# Altium PCB Laird RG191-M2 LoRa Concentrator Daughterboard.PcbDoc
Units mil, origin at the board's own origin, x right, y up, seen from the top; angles counter-clockwise.
Board outline 2120 x 3285 mil, 2 copper layers (Top Layer, Bottom Layer); 24 components, 18 nets, 185 pads, 130 vias.
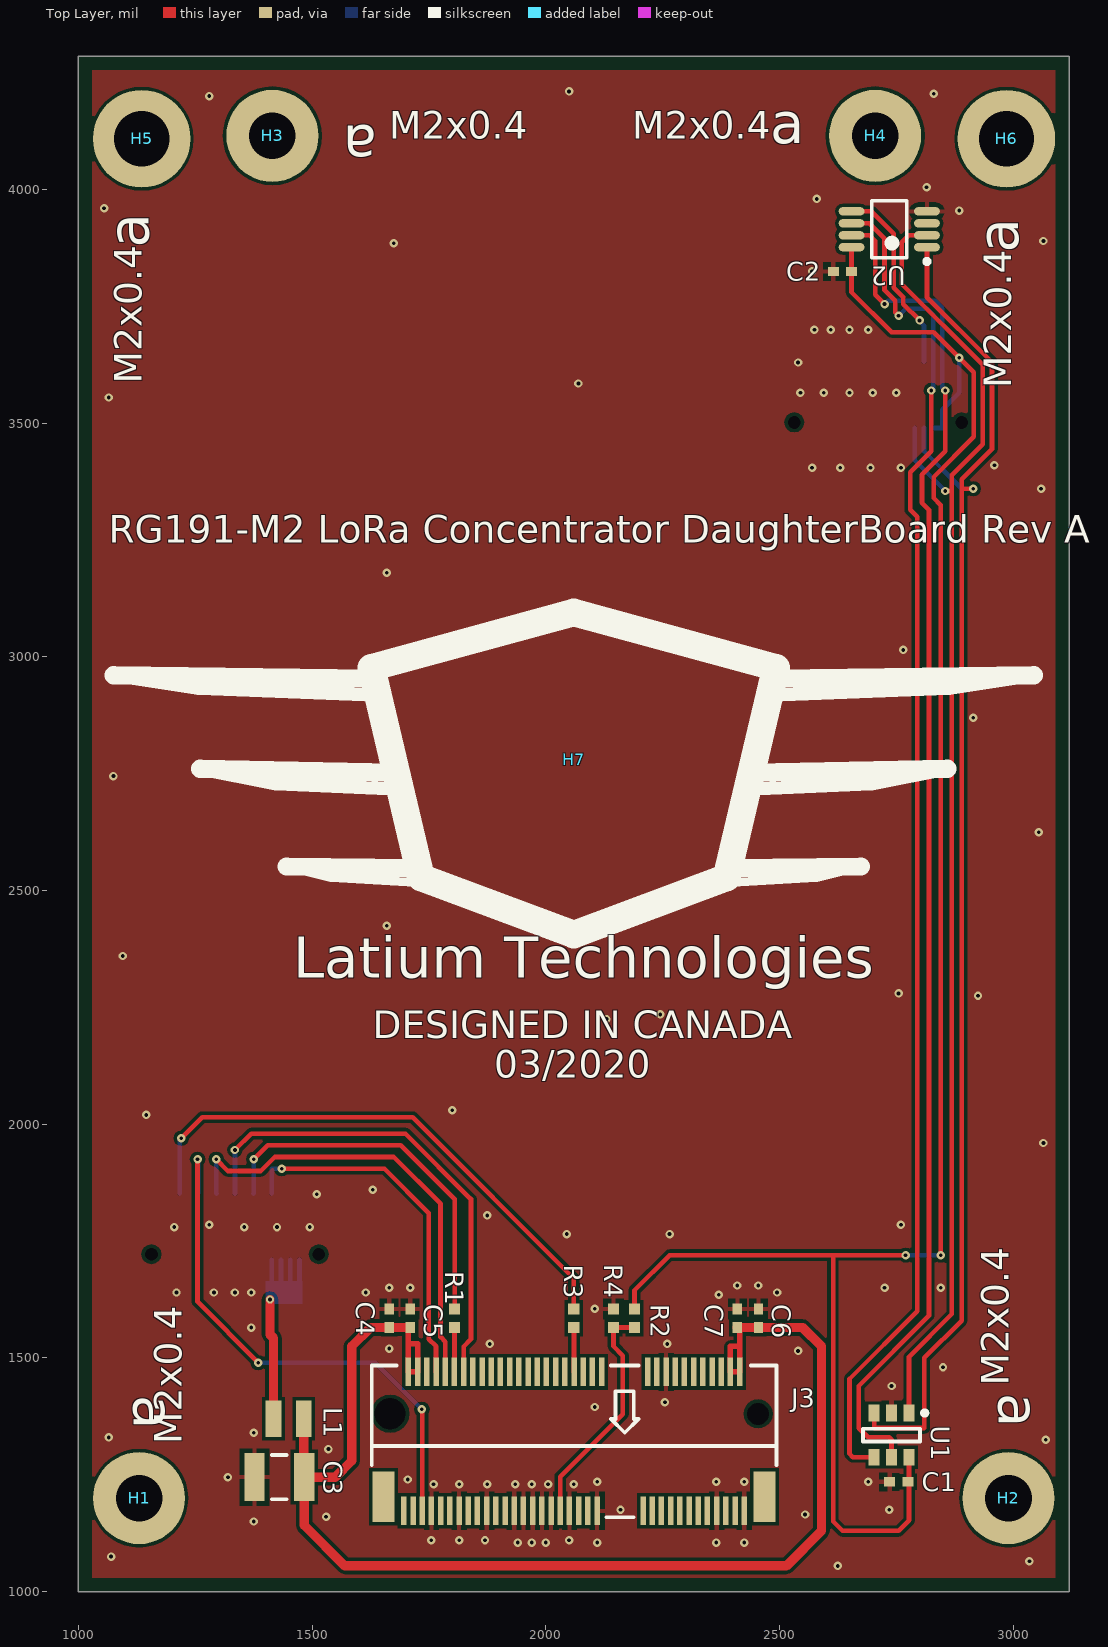
[diagram p0: Top Layer view]
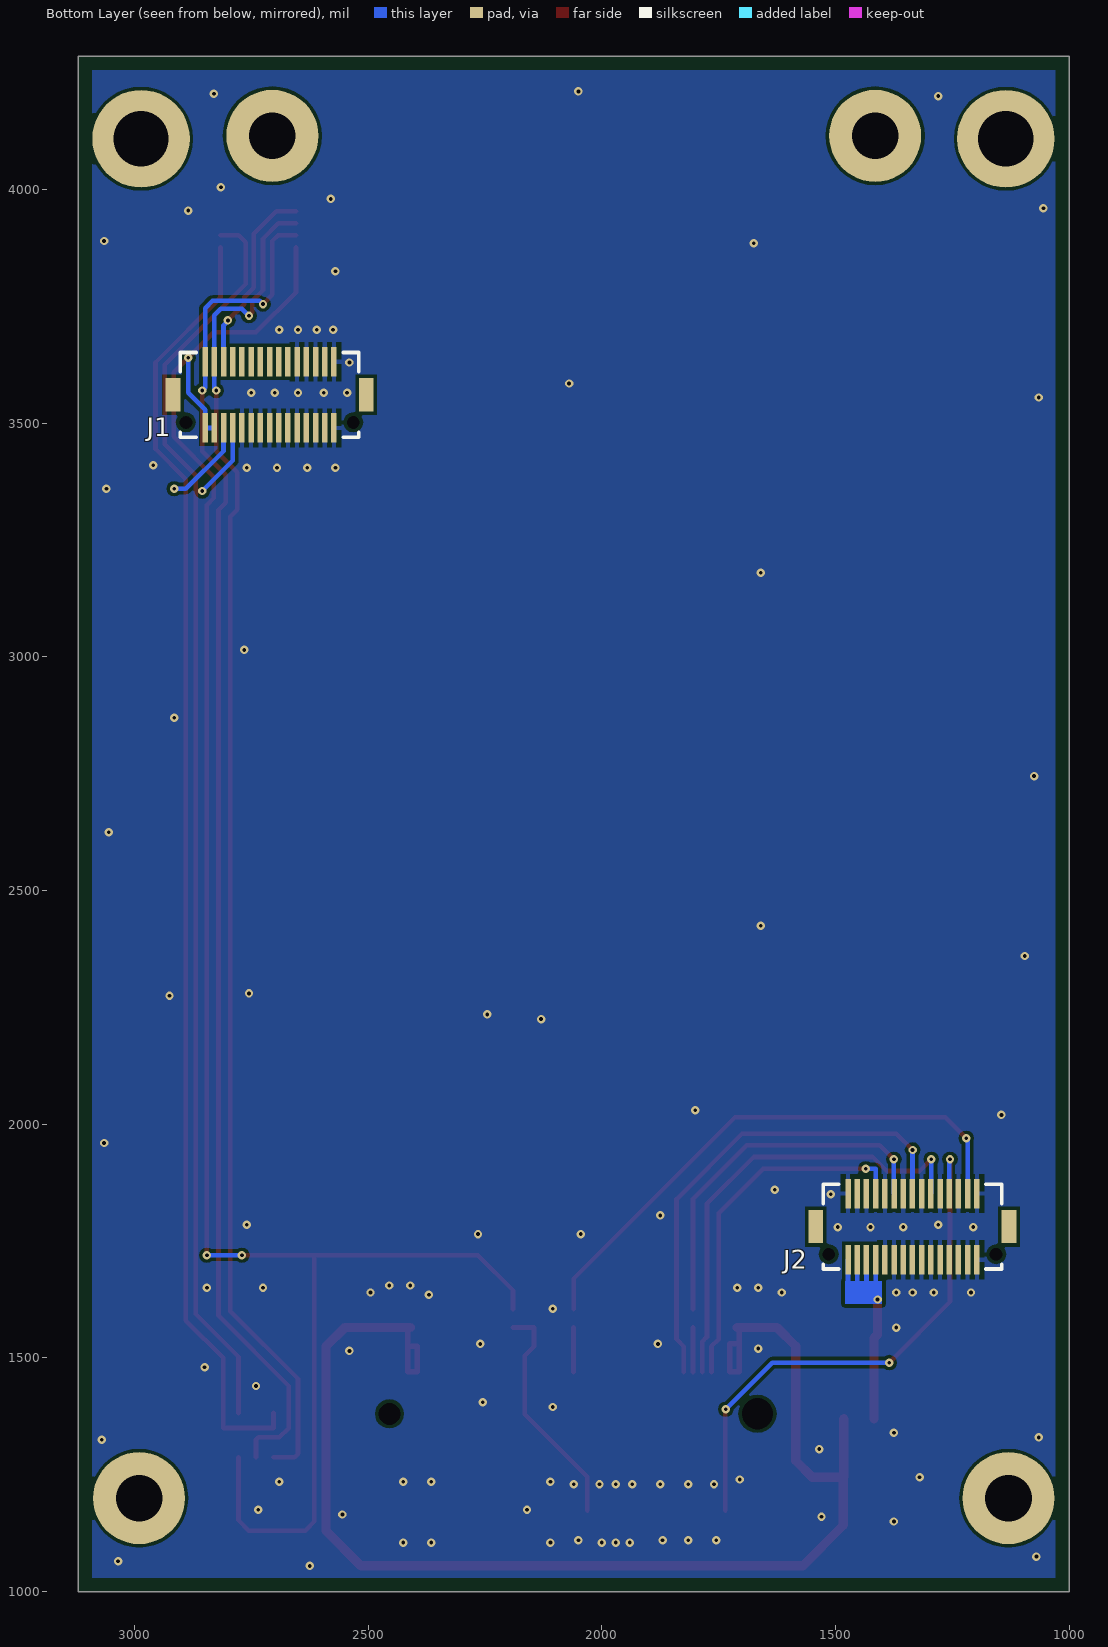
[diagram p1: Bottom Layer view, seen from below]

## Layer stack, top to bottom
Top Solder: solder mask 0.4, Solder Resist, Dk 3.5
Top Layer: signal copper 1.4
Dielectric 1: dielectric 12.6, FR-4, Dk 4.8
Bottom Layer: signal copper 1.4
Bottom Solder: solder mask 0.4, Solder Resist, Dk 3.5

## Board outline
1000,1000 1000,4285 3120,4285 3120,1000

## Design rules (kind name [scope] priority, off if disabled: settings)
Clearance [All] p1: gap=7 ignorepadtopadclearanceinfootprint=FALSE
ComponentClearance "LoRa Standoff 1" [InComponent('J3') vs InComponent('H5')] p1: gap=0 collisioncheckmode=3 verticalgap=0 showdistances=FALSE
ComponentClearance "LoRa Standoff 2" [InComponent('J3') vs InComponent('H6')] p2: gap=0 collisioncheckmode=3 verticalgap=0 showdistances=FALSE
ComponentClearance [All] p3: gap=10 collisioncheckmode=3 verticalgap=10 showdistances=FALSE
HoleSize [All] p1: absolutevalues=TRUE maxlimit=250 minlimit=1 maxpercent=80.000 minpercent=20.000
MinimumSolderMaskSliver [All] p1: minsoldermaskwidth=2
PolygonConnect "PolygonConnect Vias" [IsVia] p1: connectstyle=Direct reliefconductorwidth=10 reliefentries=4 polygonreliefangle="90 Angle" airgapwidth=10
PolygonConnect [All] p2: connectstyle=Relief reliefconductorwidth=10 reliefentries=4 polygonreliefangle="90 Angle" airgapwidth=10
RoutingVias [All] p1: holewidth=8 width=18 viastyle="Through Hole" minholewidth=8 minwidth=18 maxholewidth=28 maxwidth=50
SilkToSilkClearance [All] p1: silktosilkclearance=5
SilkToSolderMaskClearance [IsPad] p1: minsilkscreentomaskgap=5 clearancetoexposedcopper=TRUE
SolderMaskExpansion [All] p1: expansion=0
UnpouredPolygon [All] p1 off: allowunpoured=TRUE allowshelved=TRUE
Width [All] p1: maxlimit=250 minlimit=7 preferedwidth=10
24 further rules are at their usual default settings.

## Classes and differential pairs
component class "Motherboard Connectors and Memory": C1 C2 H1 H2 H3 H4 H7 J1 J2 U1 U2
component class "RG191-M2 Header": C3 C4 C5 C6 C7 H5 H6 J3 L1 R1 R2 R3 R4

## Components (designator, comment, footprint, x,y, rotation, side; value= is the part's Value field where it differs from the comment)
C1 "0.1uF 50V 10% X7R" CAPC1005L 2755,1235 r180 top
C2 "0.1uF 50V 10% X7R" CAPC1005L 2635,3825 r180 top
C3 "100uF 10V 20% X5R" C1210_L 1430,1245 r0 top
C4 "0.1uF 50V 10% X7R" CAPC1005L 1665,1585 r90 top
C5 "1nF 50V 10% X7R" CAPC1005L 1710,1585 r90 top
C6 "0.1uF 50V 10% X7R" CAPC1005L 2455,1585 r90 top
C7 "1nF 50V 10% X7R" CAPC1005L 2410,1585 r90 top
H1 "#2-56 Screw Mounting Hole" "2-56 SCREW MOUNT" 1130,1200 r0 top
H2 "#2-56 Screw Mounting Hole" "2-56 SCREW MOUNT" 2990,1200 r0 top
H3 "#2-56 Screw Mounting Hole" "2-56 SCREW MOUNT" 1415,4115 r0 top
H4 "#2-56 Screw Mounting Hole" "2-56 SCREW MOUNT" 2705,4115 r0 top
H5 "9774015243R" "WURTH 9774015243R" 1135.47,4108.78 r0 top
H6 "9774015243R" "WURTH 9774015243R" 2985.87,4108.78 r0 top
H7 "Latium Logo" LATIUMLOGO 2060,2780 r0 top
J1 "30 Pin SMD Plug" 10132797-031100LF 2848.74,3490 r0 bottom locked
J2 "30 Pin SMD Plug" 10132797-031100LF 1473.11,1710 r0 bottom locked
J3 "2199119-4" "TE 2199119-4" 2424.84,1172.76 r180 top locked
L1 "1uH 4.3A R042" "WE-LQS 252012" 1450,1370 r0 top
R1 "33R 1% 63mW" RESC1005L 1805,1585 r90 top
R2 "10k 1% 63mW" RESC1005L 2190,1585 r90 top
R3 "33R 1% 63mW" RESC1005L 2060,1585 r90 top
R4 "10k 1% 63mW" RESC1005L 2145,1585 r270 top
U1 "24AA025E64T-I/OT" MCHP-SOT-23-OT6_L 2740,1335 r270 top
U2 "TCN75AVUA713" MSOP-UA8_L 2735,3915 r180 top

## Footprints (in the part's own frame and the unit in brackets; to place one, negate y for a bottom-side part, rotate by r counter-clockwise, add the part's x,y. Pads: shape width x height; smd on the part's side, far side on the other; paste and mask are expansions set on the pad)
"2-56 SCREW MOUNT" [mm] "#2-56 Screw Mounting Hole"
  round 5 hole 2.54 unplated: MH(0,0)
10132797-031100LF [mm] "Amphenol BergStak 30 Pos SMD Plug"
  rect 0.3x1.6 smd: 1(0,0) 2(-0.5,0) 3(-1,0) 4(-1.5,0) 5(-2,0) 6(-2.5,0) 7(-3,0) 8(-3.5,0) 9(-4,0) 10(-4.5,0) 11(-5,0) 12(-5.5,0) 13(-6,0) 14(-6.5,0) 15(-7,0) 16(-7,-3.6) 17(-6.5,-3.6) 18(-6,-3.6) 19(-5.5,-3.6) 20(-5,-3.6) 21(-4.5,-3.6) 22(-4,-3.6) 23(-3.5,-3.6) 24(-3,-3.6) 25(-2.5,-3.6) 26(-2,-3.6) 27(-1.5,-3.6) 28(-1,-3.6) 29(-0.5,-3.6) 30(0,-3.6)
  round 0.3 hole 0.7 unplated: MH(-8.05,-0.3) MH(1.05,-0.3)
  rect 0.8x1.8 smd: MP1(1.75,-1.8) MP2(-8.75,-1.8)
  silkscreen extent -8.35,-4.1 1.35,0.5, body extent -8.4,-4.1 1.4,0.5, height 2.3
C1210_L [mm] "Chip Capacitor, Body 3.2x2.5mm, IPC High Density"
  rect 1.1x2.6 smd: 1(-1.35,0) 2(1.35,0)
  silkscreen extent -0.4,-1.2 0.4,1.2, body extent -1.7,-1.35 1.7,1.35, height 1.5
CAPC1005L [mm] "Chip Capacitor, Body 1.0x0.5mm, IPC High Density"
  rect 0.6x0.5 smd: 1(-0.5,0) 2(0.5,0)
  body extent -0.55,-0.3 0.55,0.3, height 0.6
LATIUMLOGO [mil] "Latium Logo"
  silkscreen extent -984,-374 984,315
MCHP-SOT-23-OT6_L [mm] "SOT23, 6-Leads, Body 2.9x1.55mm, Pitch 0.95mm, IPC High Density"
  rect 0.9x0.6 smd: 1(-1.2,0.95) 2(-1.2,0) 3(-1.2,-0.95) 4(1.2,-0.95) 5(1.2,0) 6(1.2,0.95)
  silkscreen extent -1.32,-1.55 0.35,1.93, body extent -0.9,-1.55 0.9,1.55, height 1.45
MSOP-UA8_L [mm] "TSOP, 8-Leads, Body 3x3mm, Pitch 0.65mm, IPC High Density"
  oval 1.4x0.45 smd: 1(-2.05,0.975) 2(-2.05,0.325) 3(-2.05,-0.325) 4(-2.05,-0.975) 5(2.05,-0.975) 6(2.05,-0.325) 7(2.05,0.325) 8(2.05,0.975)
  silkscreen extent -2.17,-1.55 0.95,1.87, body extent -1.55,-1.55 1.55,1.55, height 1.1
RESC1005L [mm] "Chip Resistor, Body 1.1x0.5mm, IPC High Density"
  rect 0.6x0.6 smd: 1(-0.5,0) 2(0.5,0)
  body extent -0.55,-0.3 0.55,0.3, height 0.4
"TE 2199119-4" [mm] "TE NextGen Form Factor Key E SMD Socket"
  rect 0.3x1.55 smd mask+0.102: 1(0,0) 2(0.25,-7.55) 3(0.5,0) 4(0.75,-7.55) 5(1,0) 6(1.25,-7.55) 7(1.5,0) 8(1.75,-7.55) 9(2,0) 10(2.25,-7.55) 11(2.5,0) 12(2.75,-7.55) 13(3,0) 14(3.25,-7.55) 15(3.5,0) 16(3.75,-7.55) 17(4,0) 18(4.25,-7.55) 19(4.5,0) 20(4.75,-7.55) 21(5,0) 22(5.25,-7.55) 23(5.5,0) 32(7.75,-7.55) 33(8,0) 34(8.25,-7.55) 35(8.5,0) 36(8.75,-7.55) 37(9,0) 38(9.25,-7.55) 39(9.5,0) 40(9.75,-7.55) 41(10,0) 42(10.25,-7.55) 43(10.5,0) 44(10.75,-7.55) 45(11,0) 46(11.25,-7.55) 47(11.5,0) 48(11.75,-7.55) 49(12,0) 50(12.25,-7.55) 51(12.5,0) 52(12.75,-7.55) 53(13,0) 54(13.25,-7.55) 55(13.5,0) 56(13.75,-7.55) 57(14,0) 58(14.25,-7.55) 59(14.5,0) 60(14.75,-7.55) 61(15,0) 62(15.25,-7.55) 63(15.5,0) 64(15.75,-7.55) 65(16,0) 66(16.25,-7.55) 67(16.5,0) 68(16.75,-7.55) 69(17,0) 70(17.25,-7.55) 71(17.5,0) 72(17.75,-7.55) 73(18,0) 74(18.25,-7.55) 75(18.5,0)
  round 0 hole 1.2 unplated: MH1(-0.75,-5.275)
  round 0.1 on Mech15: MH1(32.75,-74.575) MH2(-14.25,-74.575)
  round 0 hole 1.7 unplated: MH2(19.25,-5.275)
  rect 1.2x2.75 smd mask+0.102: MP1(-1.1,-0.775) MP2(19.6,-0.775)
  silkscreen extent -1.75,-7.9 20.25,0.35, body extent -17.25,-78.67 35.75,0.75, height 5.2
"WE-LQS 252012" [mm] "SMD Power Inductor, 2-Leads, Body 2.5x2.0mm"
  rect 0.85x2 smd: 1(-0.825,0) 2(0.825,0)
  body extent -1.25,-1 1.25,1, height 1.2
"WURTH 9774015243R" [mm] "Wurth 1.5mm SMD Threaded Standoff"
  round 5.3 hole 3 paste+0: MH(0,0)
  body extent -2.7,-2.7 2.7,2.7, height 1.5

## Part data
C1 C2 C3 C4 C5 C6 C7: library part Cap, "Capacitor"
H1 H2 H3 H4: library part "#2-56 Screw Support"
H5 H6: library part "SMD 1.5mm Spacer", "RND STANDOFF M2X0.4 STEEL", Manufacturer="Wurth Electronics Inc", Supplier 1 Part Number=732-7069-1-ND, ComponentLink1Description=Drawing, ComponentLink1URL="S:\Hardware\Data Sheets\Passive\Standoffs\Wurth 9774015243R.pdf", Height=1.5mm, Manufacturer Part Number=9774015243R, Supplier 1=Digi-Key
J1 J2: library part "Amphenol 30 Pos BergStak Plug", "CONN PLUG 30POS SMD GOLD", Manufacturer="Amphenol ICC (FCI)", Manufacturer Part Number=10132797-031100LF, Supplier 1 Part Number=609-5024-1-ND, Note="Mates with 10132798-031100LF receptacle 3mm between board height", Supplier 1=Digi-Key
J3: library part TE2199119-4, "CONN FEMALE 67POS 0.020 GOLD", Manufacturer="TE Connectivity AMP Connectors", Supplier 1 Part Number=A115900CT-ND, ComponentLink1Description="Data Sheet", ComponentLink1URL="S:\Hardware\Data Sheets\Passive\Connectors\TE NGFF M2 Connector.pdf", Manufacturer Part Number=2199119-4, Supplier 1=Digi-Key
L1: library part "Inductor Iron", "FIXED IND 1UH 4.3A 42 MOHM SMD", Manufacturer="Murata Electronics", Manufacturer Part Number=DFE252012P-1R0M=P2, Supplier 1 Part Number=490-10647-1-ND, Supplier 1=Digi-Key
R1 R2 R3 R4: library part Res3, "Resistor"
U1: "IC EEPROM 2K I2C 400KHZ SOT23-6", Manufacturer="Microchip Technology", Supplier 1 Part Number=24AA025E64T-I/OTCT-ND, Manufacturer Part Number=24AA025E64T-I/OT, Supplier 1=Digi-Key
U2: "SENSOR DIGITAL -40C-125C 8MSOP", Manufacturer="Microchip Technology", Supplier 1 Part Number=TCN75AVUA713CT-ND, Manufacturer Part Number=TCN75AVUA713, Supplier 1=Digi-Key

## Via types
v1: diameter 18, hole 8, Top Layer to Bottom Layer, 130 vias

## Nets (pads, with @x,y where several pads share a name; then routed paths per layer and width w, separated by ;. In a path a pad name is that pad's centre, name@x,y a point inside that pad or via, vN(x,y) a via of type N, cw(c..) or ccw(c..) an arc to the next point about the centre after c; other vN are vias at no path point)
3.3V: C1.1 C2.1 J1.1 J1.2 R2.2 U1.6 U2.8 | length 4155.9
  Top Layer w10: R2.2 2190,1645 2265,1720 2615,1720 ; U2.8 2654.29,3780.71 2740,3695 2830,3695 v1(2885,3640) 2915.86,3609.14 2915.86,3470.86 2830,3385 2830,3340 2845,3325 v1(2845,1720) ; v1(2770,1720) 2615,1720 ; U1.6 2777.4,1152.4 2755,1130 2635,1130 2615,1150 2615,1720
  Bottom Layer w10: v1(2770,1720) v1(2845,1720) ; J1.2 J1.1 2848.74,3528.74 2885,3565 v1(2885,3640)
5V: J2.1 J2.2 J2.3 J2.4 L1.1 | length 482.4
  Top Layer w20: v1(1410,1625) 1410,1550 1417.52,1542.48 L1.1
  Bottom Layer w10: 1414.06,1655.94 J2.4 ; 1433.74,1656.26 J2.3 ; 1453.43,1651.57 J2.2 ; 1473.11,1651.89 J2.1
ADDR0: J1.30 U1.5 U2.7 | length 2937.7
  Top Layer w10: U2.7 2692.8,3902.2 2705,3890 2705,3775 v1(2725,3755) ; U1.5 2740,1325 2735,1330 2690,1330 2670,1350 2670,1440 2820,1590 2820,3315 2805,3330 2805,3390 2855,3440 v1(2855,3570)
  Bottom Layer w10: v1(2725,3755) 2732,3762 2833,3762 2848.74,3746.26 J1.30 2848.74,3576.26 v1(2855,3570)
ADDR1: J1.29 U1.4 U2.6 | length 2925.9
  Top Layer w10: U2.6 2692.2,3927.8 2725,3895 2725,3785 2748,3762 2748,3737 v1(2755,3730) ; U1.4 2657.24,1287.76 2650,1295 2650,1455 2795,1600 2795,3300 2780,3315 2780,3395.3 2825,3440.3 v1(2825,3570)
  Bottom Layer w10: v1(2755,3730) 2770,3745 2815,3745 2829.06,3730.94 J1.29 2829.06,3574.06 v1(2825,3570)
ADDR2: J1.28 U2.5 | length 410.7
  Top Layer w10: U2.5 2696.61,3953.39 2745,3905 2745,3790 2765,3770 2765,3755 v1(2800,3720)
  Bottom Layer w10: v1(2800,3720) 2800,3718.74 2809.37,3709.37 J1.28
GND: C1.2 C2.2 C3.1 C4.2 C5.2 C6.2 C7.2 J1.5 J1.6 J1.7 J1.8 J1.9 J1.10 J1.11 J1.12 J1.13 J1.14 J1.15 J1.16 J1.17 J1.18 J1.19 J1.20 J2.5 J2.6 J2.7 J2.8 J2.9 J2.10 J2.11 J2.12 J2.13 J2.14 J2.15 J2.16 J2.18 J2.20 J2.22 J2.24 J2.26 J2.28 J2.29 J2.30 J3.1 J3.7 J3.18 J3.33 J3.39 J3.43 J3.45 J3.47 J3.49 J3.51 J3.57 J3.63 J3.69 R4.1 U1.2 U2.4
  other v1: 2625,1055 3035,1065 1070,1075 1940,1105 1970,1105 2000,1105 2110,1105 2365,1105 2425,1105 1755,1110 1815,1110 1870,1110 2050,1110 1375,1150 1530,1160 2555,1165 2160,1175 2735,1175 1760,1230 1815,1230 1875,1230 1935,1230 1970,1230 2005,1230 2060,1230 2110,1235 2365,1235 2425,1235 2690,1235 1705,1240 1320,1245 1535,1305 3070,1325 1065,1330 1375,1340 2105,1395 2255,1405 2740,1440 2850,1480 2540,1515 1665,1520 1880,1530 2260,1530 1370,1565 2105,1605 2370,1635 1210,1640 1290,1640 1335,1640 1370,1640 1615,1640 2495,1640 1665,1650 1710,1650 2725,1650 2845,1650 2410,1655 2455,1655 2045,1765 2265,1765 1205,1780 1355,1780 1425,1780 1495,1780 1280,1785 2760,1785 1875,1805 1510,1850 1630,1860 3065,1960 1145,2020 1800,2030 2130,2225 2245,2235 2925,2275 2755,2280 1095,2360 1660,2425 3055,2625 1075,2745 2915,2870 2765,3015 1660,3180 3060,3360 2570,3405 2630,3405 2695,3405 2760,3405 2960,3410 1065,3555 2545,3565 2595,3565 2650,3565 2700,3565 2750,3565 2070,3585 2540,3630 2575,3700 2610,3700 2650,3700 2690,3700 2570,3825 1675,3885 3065,3890 2885,3955 1055,3960 2580,3980 2815,4005 1280,4200 2830,4205 2050,4210
GPS_1PPS: J2.17 R3.2 | length 1186.3
  Top Layer w10: v1(1220,1970) 1265,2015 1715,2015 2060,1670 R3.2
  Bottom Layer w10: J2.17 1217.2,1967.2 v1(1220,1970)
L\O\R\A\_\C\S\: J2.27 J3.68 | length 774.9
  Top Layer w10: v1(1435,1905) 1655,1905 1750,1810 1750,1540 1765.39,1524.61 J3.68
  Bottom Layer w10: J2.27 1414.06,1905 v1(1435,1905)
LoRa5V: C3.2 C4.1 C5.1 C6.1 C7.1 J3.2 J3.4 J3.72 J3.74 L1.2 | length 2884.8
  Top Layer w11.8: C5.1 1706.34,1561.65 1706.34,1530 ; C7.1 2415,1560.31 2415,1525 ; 1706.34,1530 1726.02,1530 J3.72 J3.74 1706.34,1530 ; 2415,1525 2414.69,1524.69 2395.31,1524.69 J3.4 J3.2 2415,1525
  Top Layer w20: L1.2 1482.48,1245.67 C3.2 ; C5.1 C4.1 1625.32,1565.32 1585,1525 1585,1280 1550,1245 C3.2 ; C7.1 C6.1 2549.68,1565.32 2590,1525 2590,1130 2515,1055 1570,1055 1483.15,1141.85 C3.2
LORA_RESET: J2.19 J3.71 | length 1171.8
  Top Layer w10: v1(1255,1925) 1255,1620 v1(1385,1490) ; v1(1735,1390) 1735.87,1389.13 J3.71
  Bottom Layer w10: v1(1255,1925) 1256.57,1923.43 J2.19 ; v1(1385,1490) 1635,1490 v1(1735,1390)
LORA_SPI_CLK: J2.21 J3.66 | length 982
  Top Layer w10: v1(1295,1925) 1320,1900 1390,1900 1420,1930 1675,1930 1775,1830 1775,1545 1785.08,1534.92 J3.66
  Bottom Layer w10: v1(1295,1925) 1295,1852.68 J2.21
LORA_SPI_MISO: J2.25 R1.2 | length 798.8
  Top Layer w10: v1(1375,1925) 1405,1955 1690,1955 1805,1840 R1.2
  Bottom Layer w10: J2.25 1375,1852.05 v1(1375,1925)
LORA_SPI_MOSI: J2.23 J3.62 | length 1047.3
  Top Layer w10: v1(1335,1945) 1370,1980 1700,1980 1840,1840 1840,1540 1824.45,1524.45 J3.62
  Bottom Layer w10: v1(1335,1945) 1335.31,1944.69 J2.23
NetJ3_38: J3.38 R3.1 | length 95.6
  Top Layer w10: R3.1 2060.67,1564.65 J3.38
NetJ3_64: J3.64 R1.1 | length 95.4
  Top Layer w10: J3.64 1804.76,1565.08 R1.1
REGION: J3.41 R2.1 R4.2 | length 501.3
  Top Layer w10: J3.41 2031.14,1246.14 2165,1380 2165,1505 2145,1525 R4.2 R2.1
SCLK: J1.4 U1.1 U2.2 | length 2877.8
  Top Layer w10: U1.1 2777.4,1502.4 2869,1594 2869,3355 ; U2.2 2777.2,3902.2 2762,3887 2762,3798 2935,3625 2935,3455 2869,3389 2869,3355 ; v1(2855,3355) 2869,3355
  Bottom Layer w10: J1.4 2789.69,3420.31 v1(2855,3355)
SDA: J1.3 U1.3 U2.1 | length 2997.4
  Top Layer w10: U1.3 2702.6,1350 2810,1350 2810,1500 2890,1580 2890,3360 ; U2.1 2815.71,3769.29 2955,3630 2955,3445 2890,3380 2890,3360 ; v1(2915,3360) 2890,3360
  Bottom Layer w10: J1.3 2809.37,3440.63 2890,3360 v1(2915,3360)
pads on no net: H1.MH H2.MH H3.MH H4.MH H5.MH H6.MH J1.21 J1.22 J1.23 J1.24 J1.25 J1.26 J1.27 J1.MH J1.MP1 J1.MP2 J2.MH J2.MP1 J2.MP2 J3.3 J3.5 J3.6 J3.8 J3.9 J3.10 J3.11 J3.12 J3.13 J3.14 J3.15 J3.16 J3.17 J3.19 J3.20 J3.21 J3.22 J3.23 J3.32 J3.34 J3.35 J3.36 J3.37 J3.40 J3.42 J3.44 J3.46 J3.48 J3.50 J3.52 J3.53 J3.54 J3.55 J3.56 J3.58 J3.59 J3.60 J3.61 J3.65 J3.67 J3.70 J3.73 J3.75 J3.MH1 J3.MH2 J3.MP1 J3.MP2 U2.3

## Polygon pours and split planes (outlines as drawn)
GND on Bottom Layer "Bottom Layer-GND" (solid, remove dead copper, pour order 4): 1030,1030 1030,4255 3090,4255 3090,1030
GND on Top Layer "Top Layer-GND" (solid, pour order 5): 1030,1030 1030,4255 3090,4255 3090,1030

## Other copper
Bottom Layer:
  rectangle net 5V: 1400,1615 1480,1665

## Silkscreen, mask and mechanical layers (free items; w line width, h text height)
Top Overlay:
  text "a" at 1640,4165 h150 r180
  text "M2x0.4" at 1665,4090 h100
  text "M2x0.4" at 2185,4090 h100
  text "a" at 2480,4070 h150
  text "a" at 1180,3875 h150 r90
  text "a" at 3040,3865 h150 r90
  text "M2x0.4" at 1155,3585 h100 r90
  text "M2x0.4" at 3015,3575 h100 r90
  text "RG191-M2 LoRa Concentrator DaughterBoard Rev A" at 1065,3225 h100
  text "Latium Technologies" at 1460,2285 h150
  text "DESIGNED IN CANADA" at 1630,2165 h100
  text "03/2020" at 1890,2080 h100
  text "M2x0.4" at 3010,1440 h100 r90
  text "a" at 2940,1425 h150 r270
  text "a" at 1090,1420 h150 r270
  text "M2x0.4" at 1240,1315 h100 r90
Mechanical 1:
  the board outline again, w8